# Altium PCB francesco_fumagalli_atmega328_final.PcbDoc
Units mm, origin at the board's own origin, x right, y up, seen from the top; angles counter-clockwise.
Board outline 43.85 x 67.46 mm, 2 copper layers (Top Layer, Bottom Layer); 39 components, 45 nets, 173 pads, 20 vias.
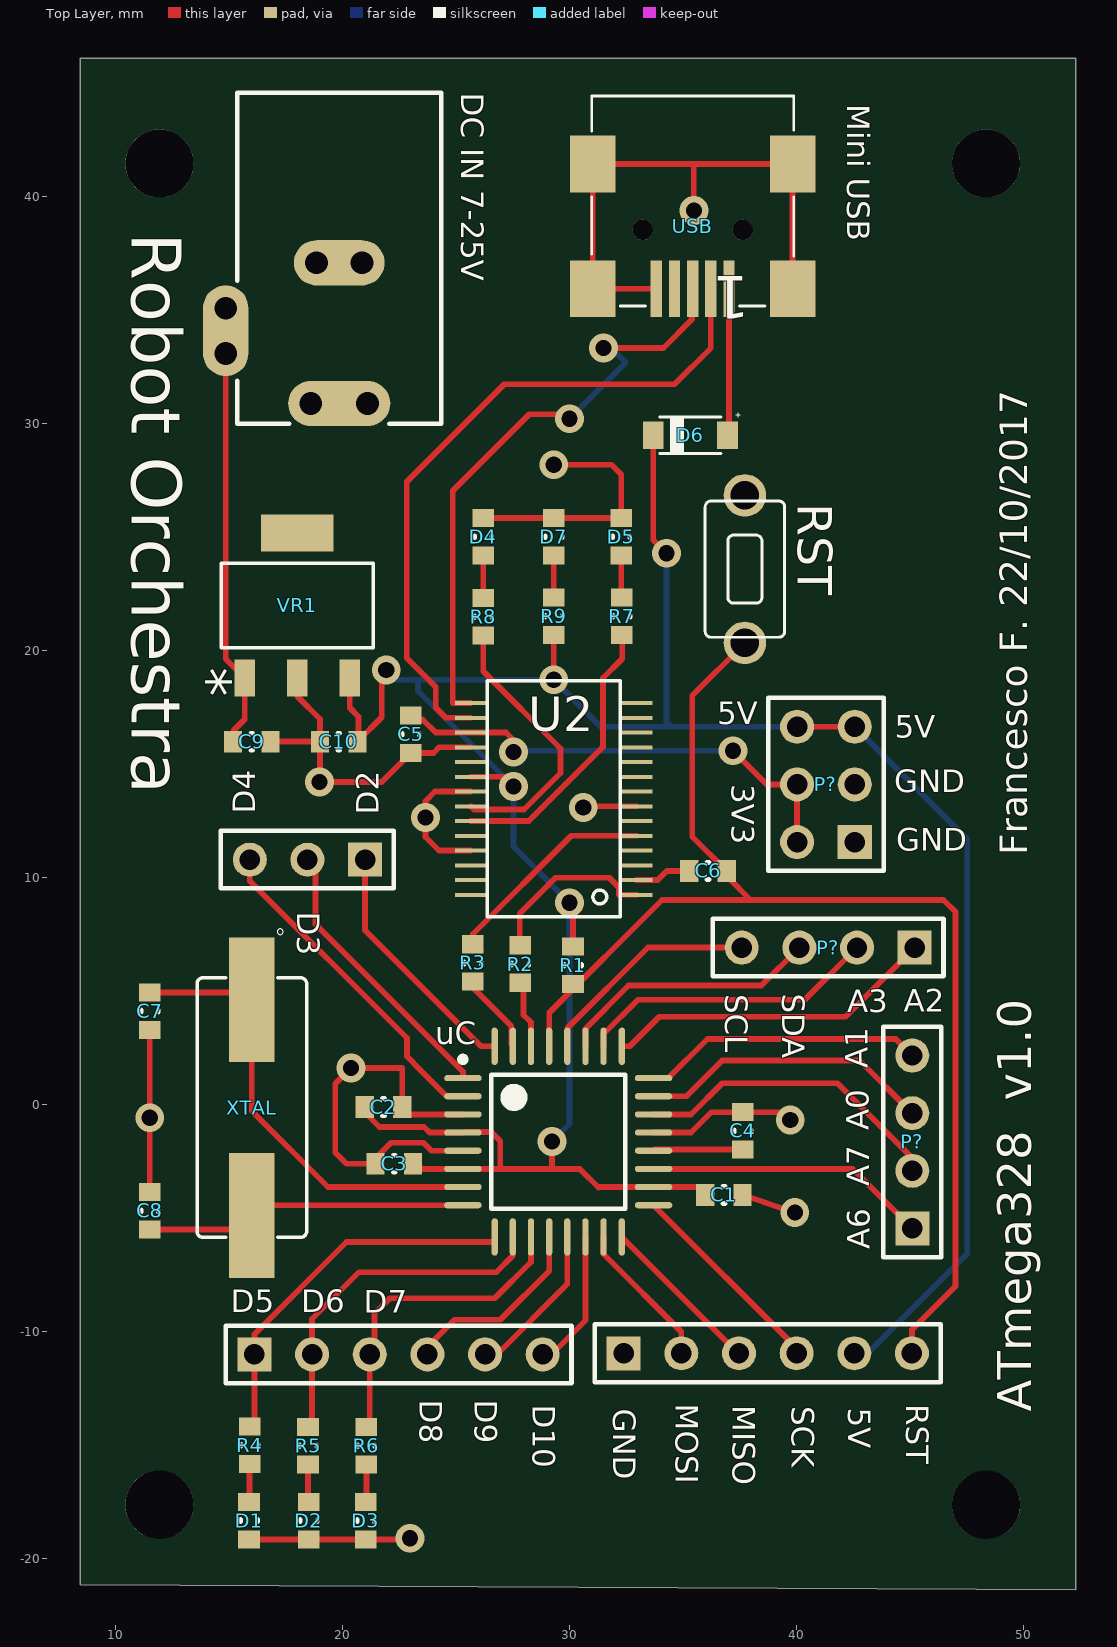
[diagram p0: Top Layer view]
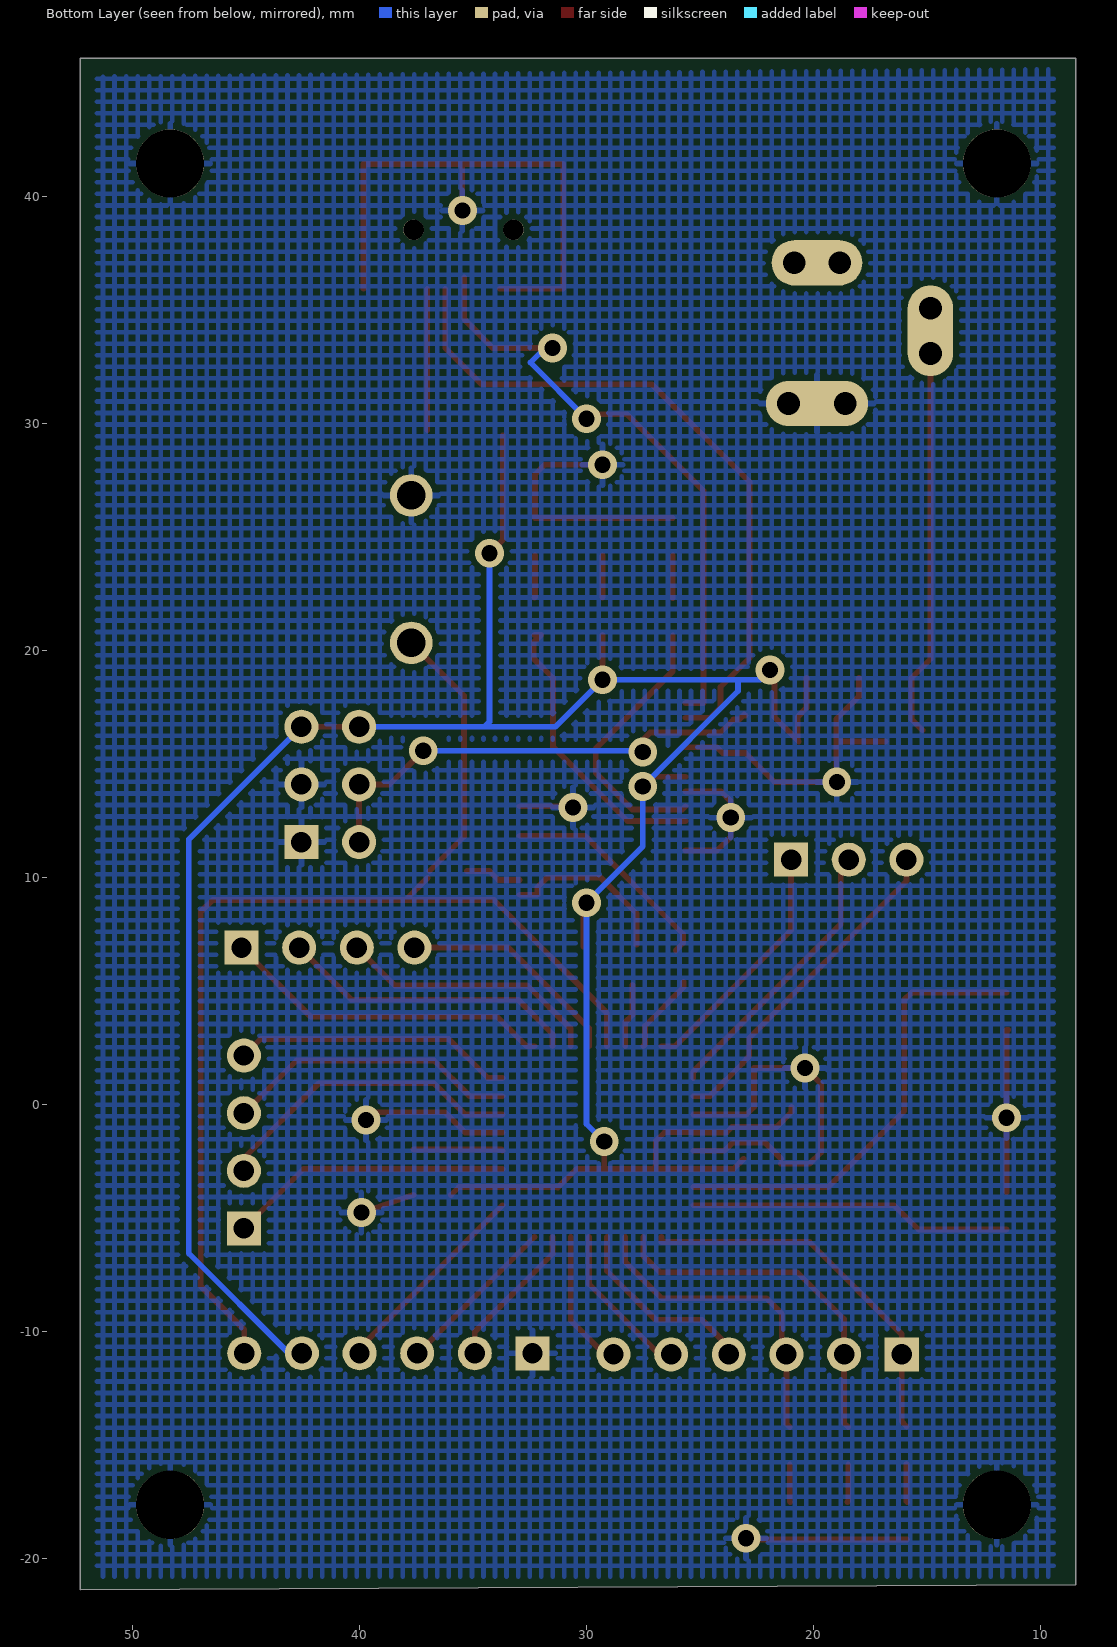
[diagram p1: Bottom Layer view, seen from below]

## Layer stack, top to bottom
Top Solder: solder mask 0.0102, Solder Resist, Dk 3.5
Top Layer: signal copper 0.0356
Dielectric 1: dielectric 0.32, FR-4, Dk 4.8
Bottom Layer: signal copper 0.0356
Bottom Solder: solder mask 0.0102, Solder Resist, Dk 3.5

## Board outline
8.45,-21.15 8.45,46.1 51.35,46.1 52.3,46.1 52.3,-21.359

## Design rules (kind name [scope] priority, off if disabled: settings)
Clearance [All] p1: gap=0.254 except(0.1: Arc-SMDPad Track-SMDPad SMDPad-SMDPad)
PolygonConnect [All] p1: connectstyle=Relief reliefconductorwidth=0.254 reliefentries=4 polygonreliefangle="90 Angle" airgapwidth=0.254
RoutingVias [All] p1: holewidth=0.711 width=1.27 viastyle="Through Hole" minholewidth=0.711 minwidth=1.27 maxholewidth=0.711 maxwidth=1.27
SolderMaskExpansion [All] p1: expansion=0.102
Width [All] p1: maxlimit=0.254 minlimit=0.254 preferedwidth=0.254
30 further rules are at their usual default settings.

## Classes and differential pairs
component class Sheet1: C1 C2 C3 C4 C5 C6 C7 C8 C9 C10 D1 D2 D3 D4 D5 D7 "DC IN 7-25V" P? R1 R2 R3 R4 R5 R6 R7 R8 R9 RST U2 uC USB VR1 XTAL
component class "Components Class 1": C1 C2 C3 C4 C5 C6 C7 C8 C9 C10 D1 D2 D3 D4 D5 D7 "DC IN 7-25V" P? R1 R2 R3 R4 R5 R6 R7 R8 R9 RST U2 uC USB VR1 XTAL

## Components (designator, comment, footprint, x,y, rotation, side; value= is the part's Value field where it differs from the comment)
C1 "Cap" CAPC1608X05N 36.8,-3.975 r180 top
C2 "Cap" CAPC1608X05N 21.8,-0.1 r180 top
C3 "Cap" CAPC1608X05N 22.275,-2.6 r0 top
C4 "Cap" CAPC1608X05N 37.625,-1.15 r270 top
C5 "Cap" CAPC1608X05N 23,16.325 r270 top
C6 "Cap" CAPC1608X05N 36.1,10.3 r0 top
C7 "" CAPC1608X05N 11.5,4.125 r270 top
C8 "" CAPC1608X05N 11.5,-4.675 r90 top
C9 "Cap" CAPC1608X05N 16,16 r0 top
C10 "Cap" CAPC1608X05N 19.825,16 r0 top
D1 "G" CAPC1608X05N 15.875,-18.325 r270 top
D2 "R" CAPC1608X05N 18.5,-18.325 r270 top
D3 "Y" CAPC1608X05N 21.025,-18.325 r270 top
D4 "Rx_LED" CAPC1608X05N 26.2,25.025 r90 top
D5 "Tx_LED" CAPC1608X05N 32.275,25.025 r90 top
D6 "MBR0520L" SOD3716X135NpbMBR0520LT1G(Primary) 35.325,29.5 r0 top
D7 "LED_G" CAPC1608X05N 29.3,25.025 r90 top
"DC IN 7-25V" "PWR2.5" KLD-0202 19.85,44.6 r270 top (schematic designator J?)
P3 "ICSP" HDR1X6 32.385,-10.95 r0 top
P? "PWR" HDR2X3_CEN 42.565,11.575 r90 top
P? "Header 4" HDR1X4 45.205,6.925 r180 top
P? "Header 4" HDR1X4 45.1,-5.45 r90 top
P? "Header 6" HDR1X6 16.115,-11 r0 top
P? "Header 3" HDR1X3 20.99,10.8 r180 top
R1 "Res3" CAPC1608X05N 30.15,6.15 r90 top
R2 "" CAPC1608X05N 27.825,6.2 r90 top
R3 "Res3" CAPC1608X05N 25.725,6.25 r90 top
R4 "Res3" CAPC1608X05N 15.9,-15 r270 top
R5 "Res3" CAPC1608X05N 18.475,-15.025 r270 top
R6 "Res3" CAPC1608X05N 21.05,-15.025 r270 top
R7 "Res3" CAPC1608X05N 32.3,21.525 r270 top
R8 "Res3" CAPC1608X05N 26.2,21.5 r270 top
R9 "Res3" CAPC1608X05N 29.3,21.525 r270 top
RST "SW" SKHLAAA010 37.725,23.6 r90 top (schematic designator B1)
U2 "FT232RL" SSOP28-LD 29.3,13.475 r90 top
uC "ATmega328P-AU" 32A_N 29.5,-1.625 r0 top (schematic designator U1)
USB "mini usb" 65100516121_65100516121(Primary) 35.425,38.55 r180 top (schematic designator J1)
VR1 "Volt Reg" SOT230P700X180-4N 18,22 r90 top
XTAL "XTAL16Mhz" XTAL1170X500X450 16,-0.125 r270 top (schematic designator Y1)

## Footprints (in the part's own frame and the unit in brackets; to place one, negate y for a bottom-side part, rotate by r counter-clockwise, add the part's x,y. Pads: shape width x height; smd on the part's side, far side on the other; paste and mask are expansions set on the pad)
32A_N [mm] "Thin QFP, 32-Leads, Body 7x7mm, Pitch 0.8mm, IPC Medium Density"
  oval 1.65x0.275 smd: 1(-4.2,2.8) 2(-4.2,2) 3(-4.2,1.2) 4(-4.2,0.4) 5(-4.2,-0.4) 6(-4.2,-1.2) 7(-4.2,-2) 8(-4.2,-2.8) 17(4.2,-2.8) 18(4.2,-2) 19(4.2,-1.2) 20(4.2,-0.4) 21(4.2,0.4) 22(4.2,1.2) 23(4.2,2) 24(4.2,2.8)
  oval 0.275x1.65 smd: 9(-2.8,-4.2) 10(-2,-4.2) 11(-1.2,-4.2) 12(-0.4,-4.2) 13(0.4,-4.2) 14(1.2,-4.2) 15(2,-4.2) 16(2.8,-4.2) 25(2.8,4.2) 26(2,4.2) 27(1.2,4.2) 28(0.4,4.2) 29(-0.4,4.2) 30(-1.2,4.2) 31(-2,4.2) 32(-2.8,4.2)
  silkscreen extent -4.32,-2.95 2.95,3.75, body extent -3.5,-3.5 3.5,3.5, height 1.2
65100516121_65100516121(Primary) [mm]
  rect 0.5x2.5 smd: 1(-1.6,2.6) 2(-0.8,2.6) 3(0,2.6) 4(0.8,2.6) 5(1.6,2.6)
  round 0.9 hole 0.9 unplated: None(-2.2,0) None(2.2,0)
  rect 2x2.5 smd: SHELL(-4.4,2.6) SHELL1(4.4,2.6) SHELL2(-4.4,-2.9) SHELL3(4.4,-2.9)
  silkscreen extent -4.45,-5.9 4.45,3.35
CAPC1608X05N [mm] "Chip Capacitor, 2-Leads, Body 1.60x0.80mm, IPC Medium Density"
  rect 0.8x0.95 smd: 1(-0.825,0) 2(0.825,0)
  silkscreen extent -0.05,-0.38 0.05,0.38, body extent -0.8,-0.4 0.8,0.4, height 0.5
HDR1X3 [mm] "Connector; Header; 3 Position"
  rect 1.5x1.5 hole 0.9: 1(0,0)
  round 1.5 hole 0.9: 2(2.54,0) 3(5.08,0)
  silkscreen extent -1.27,-1.27 6.35,1.27
HDR1X4 [mm] "Connector; Header; 4 Position"
  rect 1.5x1.5 hole 0.9: 1(0,0)
  round 1.5 hole 0.9: 2(2.54,0) 3(5.08,0) 4(7.62,0)
  silkscreen extent -1.27,-1.27 8.89,1.27
HDR1X6 [mm] "Connector; Header; 6 Position"
  rect 1.5x1.5 hole 0.9: 1(0,0)
  round 1.5 hole 0.9: 2(2.54,0) 3(5.08,0) 4(7.62,0) 5(10.16,0) 6(12.7,0)
  silkscreen extent -1.27,-1.27 13.97,1.27
HDR2X3_CEN [mm] "Connector; Header; 3x2 Position"
  rect 1.5x1.5 hole 0.9: 1(0,0)
  round 1.5 hole 0.9: 2(2.54,0) 3(5.08,0) 4(0,2.54) 5(2.54,2.54) 6(5.08,2.54)
  silkscreen extent -1.27,-1.27 6.35,3.81
KLD-0202 [mm] "DC Power Jack, 2.5mm, KLD Series, PCB Mount"
  oval 2x4.5 all layers, no hole: 1(13.7,0)
  round 1.5 hole 1: 1A(13.7,-1.25) 1B(13.7,1.25) 2A(7.5,-1) 2B(7.5,1) 3A(9.5,-5) 3B(11.5,-5)
  oval 2x4 all layers, no hole: 2(7.5,0)
  oval 4x2 all layers, no hole: 3(10.5,-5)
  silkscreen extent 0,-4.5 14.6,4.5
SKHLAAA010 [mm]
  round 1.875 hole 1.25: 1(-3.25,0) 2(3.25,0)
  silkscreen extent -3,-1.75 3,1.75
SOD3716X135NpbMBR0520LT1G(Primary) [mm]
  rect 0.91x1.22 smd: A(1.635,0) C(-1.635,0)
  silkscreen extent -1.35,-0.8 2.2,1
SOT230P700X180-4N [mil]
  rect 64x35 smd: 1(-126,91) 2(-126,0) 3(-126,-91)
  rect 64x125 smd: 4(126,0)
  silkscreen extent -73,-132 73,132
SSOP28-LD [mil]
  rect 6.85x55 smd: 1(-166.34,-143.94) 2(-140.75,-143.94) 3(-115.16,-143.94) 4(-89.57,-143.94) 5(-63.98,-143.94) 6(-38.39,-143.94) 7(-12.8,-143.94) 8(12.79,-143.94) 9(38.39,-143.94) 10(63.98,-143.94) 11(89.57,-143.94) 12(115.16,-143.94) 13(140.75,-143.94) 14(166.34,-143.94) 15(166.34,143.94) 16(140.75,143.94) 17(115.16,143.94) 18(89.57,143.94) 19(63.98,143.94) 20(38.39,143.94) 21(12.79,143.94) 22(-12.8,143.94) 23(-38.39,143.94) 24(-63.98,143.94) 25(-89.57,143.94) 26(-115.16,143.94) 27(-140.75,143.94) 28(-166.34,143.94)
  silkscreen extent -205,-115 205,115
XTAL1170X500X450 [mm]
  rect 5.5x2 smd: 1(-4.75,0) 2(4.75,0)
  silkscreen extent -7.88,-2.41 5.72,2.41

## Part data
C1 C2 C3 C4 C5 C6 C9 C10: "Capacitor"
C7 C8: library part Cap, "Capacitor"
D1 D2 D3 D4 D5 D7: library part LED0, "Typical INFRARED GaAs LED"
D6: library part MBR0520LT1G, "Rectifier, Schottky Power; Plastic Sod-123; 0.5 a @ +90c If; +125; 20v; 1000"
"DC IN 7-25V": "Low Voltage Power Supply Connector"
P3: library part "Header 6", "Header, 6-Pin"
P?: library part "Header 3X2A", "Header, 3-Pin, Dual row"
P? P?: "Header, 4-Pin"
P?: "Header, 6-Pin"
P?: "Header, 3-Pin"
R1 R3 R4 R5 R6 R7 R8 R9: "Resistor"
R2: library part Res3, "Resistor"
RST: library part SKHLAAA010, "Single Pole Single Throw Tactile Pushbutton Switch Off Momentaty (On)"
U2: "USB-to-UART 1-CH 256Byte FIFO 5V 28-Pin SSOP"
uC: "8-bit AVR Microcontroller, 32KB Flash, 1KB EEPROM, 2KB SRAM, 32-pin TQFP, Industrial Grade (-40°C to 85°C)"
USB: library part 65100516121, "WR-COM Series Right Angle SMT Type B Mini USB Connector Receptacle, 30 V ac, 1A"
VR1: "Voltage Regulator"
XTAL: library part FOXSDLF/040, "Crystal 4MHz ?30ppm (Tol) ?50ppm (Stability) 20pF FUND 200Ohm 2-Pin HC-49/SDLF SMD T/R"

## Free pads (board coordinates)
  round 3 hole 3: 0(48.35,41.475) 1(48.35,-17.625) 2(11.925,-17.625) 4(11.925,41.475)

## Via types
v1: diameter 1.27, hole 0.711, Top Layer to Bottom Layer, 20 vias

## Nets (pads, with @x,y where several pads share a name; then routed paths per layer and width w, separated by ;. In a path a pad name is that pad's centre, name@x,y a point inside that pad or via, vN(x,y) a via of type N, cw(c..) or ccw(c..) an arc to the next point about the centre after c; other vN are vias at no path point)
+3V3: C5.1 P?.4@40.025,11.575 P?.5@40.025,14.115 U2.17 | length 21.4
  Top Layer w0.254: C5.1 23.05,17.2 23.275,16.975 23.525,16.975 24.1,16.4 U2.17 27.2,16.4 27.525,16.075 v1(27.525,15.55) ; v1(37.2,15.6) 38.685,14.115 40.025,14.115 P?.4@40.025,11.575
  Bottom Layer w0.254: v1(27.525,15.55) 27.55,15.55 27.75,15.35 28,15.6 v1(37.2,15.6)
+5V: C1.2 C2.2 C3.2 C10.2 D6.C P3.5 P?.3@42.565,16.655 P?.6@40.025,16.655 R1.2 R9.2 U2.20 uC.4 uC.6 uC.18 VR1.3 | length 126.2
  Top Layer w0.254: VR1.3 20.311,17.489 20.7,17.1 C10.2@20.7,16.05 ; C10.2 C10.2@20.7,16.05 ; C2.2 20.975,-0.325 21.625,-0.975 23.589,-0.975 23.839,-1.225 uC.4 25.325,-1.2 26.55,-1.2 26.95,-1.6 26.95,-2.725 27.05,-2.825 ; v1(21.925,19.15) 21.775,19.3 21.725,19.3 21.725,17.075 C10.2@20.7,16.05 ; C3.2@23.075,-2.375 23.525,-2.825 uC.6 27.05,-2.825 ; U2.20 27.25,14.45 27.526,14.174 v1(27.526,14.026) ; v1(29.225,-1.625) 29.225,-2.775 29.175,-2.825 ; v1(29.3,18.725) R9.2 ; v1(30,8.9) 30,8.4 30.15,8.25 R1.2 ; D6.C 33.69,24.885 v1(34.275,24.3) ; C1.2 35.625,-3.625 uC.18 31.3,-3.625 31.275,-3.65 30.45,-2.825 29.175,-2.825 ; P?.6@40.025,16.655 P?.3@42.565,16.655 ; 27.05,-2.825 29.175,-2.825
  Bottom Layer w0.254: v1(21.925,19.15) 22.35,18.725 23.325,18.725 ; v1(29.225,-1.625) 30,-0.85 v1(30,8.9) 27.526,11.374 v1(27.526,14.026) 23.325,18.227 23.325,18.725 ; v1(34.275,24.3) 34.275,16.88 34.5,16.655 ; P?.6@40.025,16.655 34.5,16.655 ; P3.5 43.125,-10.95 47.525,-6.55 47.525,11.695 P?.3@42.565,16.655 ; 23.325,18.725 v1(29.3,18.725) 31.37,16.655 34.5,16.655
A0: P?.3@45.1,-0.37 uC.23 | length 13
  Top Layer w0.254: uC.23 35.15,0.375 36.725,1.95 42.78,1.95 P?.3@45.1,-0.37
A1: P?.4@45.1,2.17 uC.24 | length 12.4
  Top Layer w0.254: uC.24 34.35,1.175 36.075,2.9 44.37,2.9 P?.4@45.1,2.17
A2: P?.1@45.205,6.925 uC.25 | length 14.7
  Top Layer w0.254: uC.25 32.65,2.575 33.95,3.875 42.155,3.875 P?.1@45.205,6.925
A3: P?.2@42.665,6.925 uC.26 | length 13.3
  Top Layer w0.254: uC.26 31.5,3.117 33.008,4.625 40.365,4.625 P?.2@42.665,6.925
A6: P?.1@45.1,-5.45 uC.19 | length 12.5
  Top Layer w0.254: uC.19 42.475,-2.825 P?.1@45.1,-5.45
A7: P?.2@45.1,-2.91 uC.22 | length 13.9
  Top Layer w0.254: uC.22 35.35,-0.425 36.725,0.95 41.8,0.95 45.1,-2.35 P?.2@45.1,-2.91
D2: P?.1@20.99,10.8 uC.32 | length 10.9
  Top Layer w0.254: P?.1@20.99,10.8 20.99,7.685 26.1,2.575 uC.32
D3: P?.2@18.45,10.8 uC.1 | length 12.5
  Top Layer w0.254: P?.2@18.45,10.8 18.8,10.45 18.8,7.95 25.3,1.45 uC.1
D4: P?.3@15.91,10.8 uC.2 | length 14.7
  Top Layer w0.254: P?.3@15.91,10.8 15.91,9.865 22.835,2.94 22.835,2.133 23.133,1.835 23.133,1.817 24.575,0.375 uC.2
D5: P?.1@16.115,-11 R4.1 uC.9 | length 16.6
  Top Layer w0.254: R4.1 16.115,-13.96 16.115,-11 16.115,-10.11 20.175,-6.05 26.7,-6.05 uC.9
D6: P?.2@18.655,-11 R5.1 uC.10 | length 15.7
  Top Layer w0.254: R5.1 18.655,-14.02 18.655,-11 18.655,-9.445 20.725,-7.375 26.775,-7.375 27.5,-6.65 uC.10
D7: P?.3@21.195,-11 R6.1 uC.11 | length 14.1
  Top Layer w0.254: R6.1 21.195,-14.055 21.195,-11 21.4,-10.795 21.4,-9.2 22.075,-8.525 26.7,-8.525 28.3,-6.925 uC.11
D8: P?.4@23.735,-11 uC.12 | length 8.6
  Top Layer w0.254: P?.4@23.735,-11 23.735,-10.665 24.925,-9.475 26.95,-9.475 29.1,-7.325 uC.12
D9: P?.5@26.275,-11 uC.13 | length 7
  Top Layer w0.254: P?.5@26.275,-11 26.8,-11 29.9,-7.9 uC.13
D10: P?.6@28.815,-11 uC.14 | length 6.2
  Top Layer w0.254: P?.6@28.815,-11 29.2,-11 30.7,-9.5 uC.14
DM: U2.16 USB.2 | length 30.7
  Top Layer w0.254: U2.16 24.54,17.05 24.43,17.16 24.1,17.49 24.1,18.412 22.825,19.687 22.825,27.45 27.125,31.75 34.625,31.75 36.225,33.35 USB.2
DP: U2.15 USB.3 | length 27.9
  Top Layer w0.254: U2.15 24.85,17.7 24.85,27.05 28.225,30.425 30,30.425 v1(30,30.225) ; v1(31.496,33.349) 34.137,33.349 35.394,34.606 USB.3@35.394,36.458
  Bottom Layer w0.254: v1(30,30.225) 32.475,32.7 31.826,33.349 v1(31.496,33.349)
GND: "DC IN 7-25V.1" "DC IN 7-25V.1A" "DC IN 7-25V.1B" C1.1 C2.1 C3.1 C4.1 C5.2 C7.2 C8.2 C9.2 C10.1 D1.2 D2.2 D3.2 D4.2 D5.2 D7.2 P3.1 P?.1@42.565,11.575 P?.2@42.565,14.115 pad.0 pad.1 pad.2 pad.4 RST.2 U2.7 U2.18 U2.21 U2.25 uC.3 uC.5 uC.21 USB.5 USB.SHELL USB.SHELL1 USB.SHELL2 USB.SHELL3 VR1.2 | length 99.1
  Top Layer w0.254: C7.2@11.425,3.3 C7.2@11.5,3.225 ; C8.2 v1(11.5,-0.575) C7.2@11.5,3.225 ; C7.2 C7.2@11.5,3.225 ; D1.2 D2.2 D3.2 22.925,-19.15 v1(22.975,-19.1) ; C9.2 C10.1 ; VR1.2 18,18 19,17 C10.1 ; C3.1@21.425,-2.375 22.127,-1.673 23.569,-1.673 23.921,-2.025 uC.5 ; C3.1 20.175,-2.6 19.675,-2.1 19.675,0.925 v1(20.375,1.625) 22.625,1.625 C2.1 22.95,-0.425 uC.3 ; U2.25 24.25,11.2 23.65,11.8 v1(23.65,12.65) 23.65,13.375 24.075,13.8 U2.21 ; U2.18 24.25,15.75 24,15.5 C5.2 21.725,14.225 v1(18.975,14.225) 19,14.25 C10.1 ; D4.2 D7.2 D5.2 32.275,27.775 31.85,28.2 v1(29.3,28.2) ; v1(30.6,13.1) 30.65,13.15 U2.7 ; uC.21 35.35,-1.225 36.25,-0.325 C4.1 39.375,-0.325 v1(39.725,-0.675) ; USB.5 USB.SHELL1 USB.SHELL3 35.475,41.45 ; v1(35.475,39.4) 35.475,41.45 ; C1.1 v1(39.925,-4.75) ; USB.SHELL USB.SHELL2 35.475,41.45
MISO: P3.3 uC.16 | length 7.3
  Top Layer w0.254: uC.16 37.425,-10.95 P3.3
MOSI: P3.2 uC.15 | length 6.5
  Top Layer w0.254: uC.15 31.5,-6.579 34.925,-10.004 P3.2
NetC4_2: C4.2 uC.20 | length 3.9
  Top Layer w0.254: uC.20 33.75,-1.975 C4.2
NetC6_1: C6.1 U2.2 | length 2.5
  Top Layer w0.254: U2.2 33.882,9.9 34.281,10.3 C6.1
NetC7_1: C7.1 uC.7 XTAL.1 | length 20.2
  Top Layer w0.254: C7.1 15.675,4.95 XTAL.1 16,-0.275 19.35,-3.625 uC.7
NetC8_1: C8.1 uC.8 XTAL.2 | length 14.2
  Top Layer w0.254: C8.1 15.375,-5.5 XTAL.2 16.45,-4.425 uC.8
NetD1_1: D1.1 R4.2 | length 1.7
  Top Layer w0.254: D1.1 15.9,-17.475 R4.2
NetD2_1: D2.1 R5.2 | length 1.7
  Top Layer w0.254: R5.2 18.475,-17.475 D2.1
NetD3_1: D3.1 R6.2 | length 1.7
  Top Layer w0.254: D3.1 21.05,-17.475 R6.2
NetD4_1: D4.1 R8.1 | length 1.9
  Top Layer w0.254: R8.1 D4.1
NetD5_1: D5.1 R7.1 | length 1.9
  Top Layer w0.254: D5.1 32.275,22.375 R7.1
NetD7_1: D7.1 R9.1 | length 1.9
  Top Layer w0.254: R9.1 D7.1
NetJ?_2: "DC IN 7-25V.2" "DC IN 7-25V.2A" "DC IN 7-25V.2B"
NetR2_1: R2.1 uC.30 | length 2.8
  Top Layer w0.254: R2.1@27.975,5.275 27.975,3.956 28.3,3.631 uC.30
NetR3_1: R3.1 uC.31 | length 3.6
  Top Layer w0.254: R3.1 25.725,5.175 27.425,3.475 27.425,2.65 uC.31
NetR7_2: R7.2 U2.23 | length 12.9
  Top Layer w0.254: U2.23 28.2,12.5 31.475,15.775 31.475,18.8 32.325,19.65 32.325,20.375 32,20.7 R7.2
NetR8_2: R8.2 U2.22 | length 12.1
  Top Layer w0.254: U2.22 25.784,13.01 27.991,13.01 29.6,14.618 29.6,15.7 26.2,19.1 R8.2
PWR_IN: "DC IN 7-25V.3" "DC IN 7-25V.3A" "DC IN 7-25V.3B" C9.1 VR1.1 | length 17.1
  Top Layer w0.254: 14.85,33.1 14.85,19.638 VR1.1 15.689,16.989 15.2,16.5
RESET: C6.2 P3.6 R1.1 RST.1 uC.29 | length 54.9
  Top Layer w0.254: uC.29 29.108,2.583 29.108,4.058 34.075,9.025 37.975,9.025 ; C6.2 35.4,11.825 35.4,18.025 RST.1 ; C6.2@37,10 37.975,9.025 ; P3.6 45.085,-9.915 47,-8 47,8.5 46.475,9.025 37.975,9.025
RX: R2.2 U2.1 | length 7.7
  Top Layer w0.254: R2.2@27.8,7.05 27.8,8.425 29.375,10 31.75,10 32.163,9.586 32.163,9.25 U2.1
SCK: P3.4 uC.17 | length 9.1
  Top Layer w0.254: uC.17 40.005,-10.73 P3.4
SCL: P?.4@37.585,6.925 uC.28 | length 10
  Top Layer w0.254: uC.28 29.9,3.375 33.45,6.925 P?.4@37.585,6.925
SDA: P?.3@40.125,6.925 uC.27 | length 11.7
  Top Layer w0.254: uC.27 30.7,3.35 32.6,5.25 38.45,5.25 P?.3@40.125,6.925
TX: R3.2 U2.5 | length 9.9
  Top Layer w0.254: R3.2@26.075,6.8 25.75,7.125 25.75,7.525 30.075,11.85 U2.5
VUSB: D6.A USB.1 | length 6.2
  Top Layer w0.254: D6.A@37.025,29.725 USB.1
pads on no net: U2.3 U2.4 U2.6 U2.8 U2.9 U2.10 U2.11 U2.12 U2.13 U2.14 U2.19 U2.24 U2.26 U2.27 U2.28 USB.4 USB.None VR1.4

## Polygon pours and split planes (outlines as drawn)
GND on Bottom Layer "gnd" (hatched 90Degree grid 0.508 track 0.203, pour order 10): 9.425,45.625 9.425,-20.8 51.575,-20.8 51.575,45.3

## Silkscreen, mask and mechanical layers (free items; w line width, h text height)
Top Overlay:
  text "Mini USB" at 42.225,44.075 h1 r270
  text "Robot Orchestra" at 10.7,38.425 h2.2 r270
  text "5V" at 36.5,16.775 h1
  text "5V" at 44.325,16.175 h1
  text "3V3" at 37.15,14.125 h1 r270
  text "GND" at 44.3,13.775 h1
  text "D4" at 16.15,12.825 h1 r90
  text "D2" at 21.6,12.775 h1 r90
  text "GND" at 44.4,11.2 h1
  text "Francesco F. 22/10/2017" at 50.175,11 h1.2 r90
  text "D3" at 18,8.5 h1 r270
  text "SDA" at 39.375,4.9 h1 r270
  text "SCL" at 36.85,4.875 h1 r270
  text "A2" at 44.725,4.1 h1
  text "A3" at 42.225,4.075 h1
  text "A1" at 43.13,1.6 h1 r90
  text "A0" at 43.18,-1.112 h1 r90
  text "A7" at 43.2,-3.6 h1 r90
  text "A6" at 43.225,-6.375 h1 r90
  text "D5" at 15.075,-9.15 h1
  text "D6" at 18.175,-9.15 h1
  text "D7" at 20.925,-9.175 h1
  text "D8" at 23.4,-13 h1 r270
  text "D9" at 25.825,-13 h1 r270
  text "MOSI" at 34.675,-13.175 h1 r270
  text "RST" at 44.825,-13.2 h1 r270
  text "D10" at 28.375,-13.225 h1 r270
  text "MISO" at 37.2,-13.25 h1 r270
  text "SCK" at 39.8,-13.275 h1 r270
  text "5V" at 42.275,-13.35 h1 r270
  text "GND" at 31.925,-13.4 h1 r270
  text "ATmega328  v1.0" at 50.35,-13.525 h1.5 r90

## Text inside footprints (layer, text, board x,y; h text height)
USB: Top Overlay "1" at 37.928,36.497 h1.88 r180; Mechanical 1 "5" at 33.219,36.394 h1.88 r180; Mechanical 1 "1" at 37.934,36.491 h1.88 r180
VR1: Top Overlay "*" at 15.858,17.979 h1.88 r90; Mechanical 1 "*" at 15.859,17.98 h1.88 r90